# Altium PCB PCB2.PcbDoc
Units mil, origin at the board's own origin, x right, y up, seen from the top; angles counter-clockwise.
Board outline 6000 x 4000 mil, 2 copper layers (Top Layer, Bottom Layer); 91 components, 50 nets, 356 pads, 23 vias.
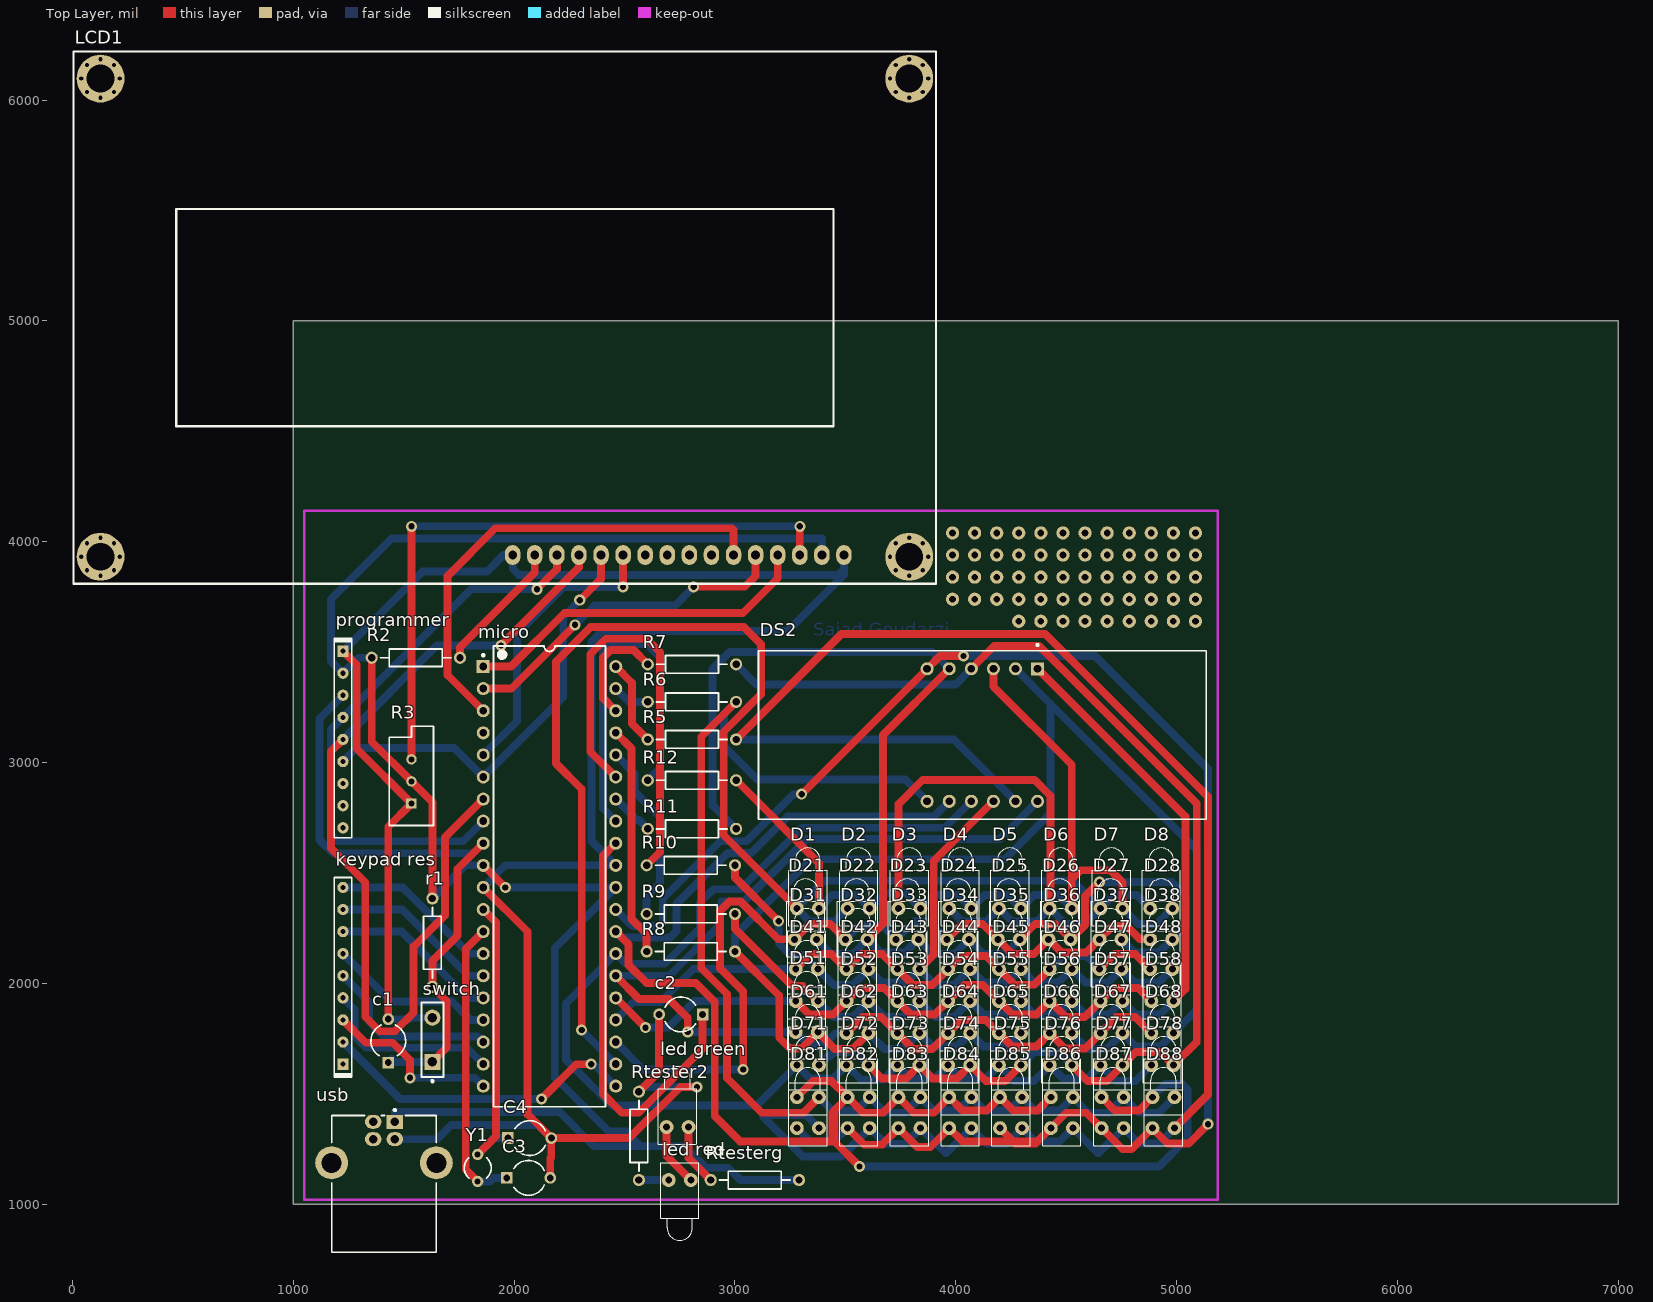
[diagram p0: Top Layer view]
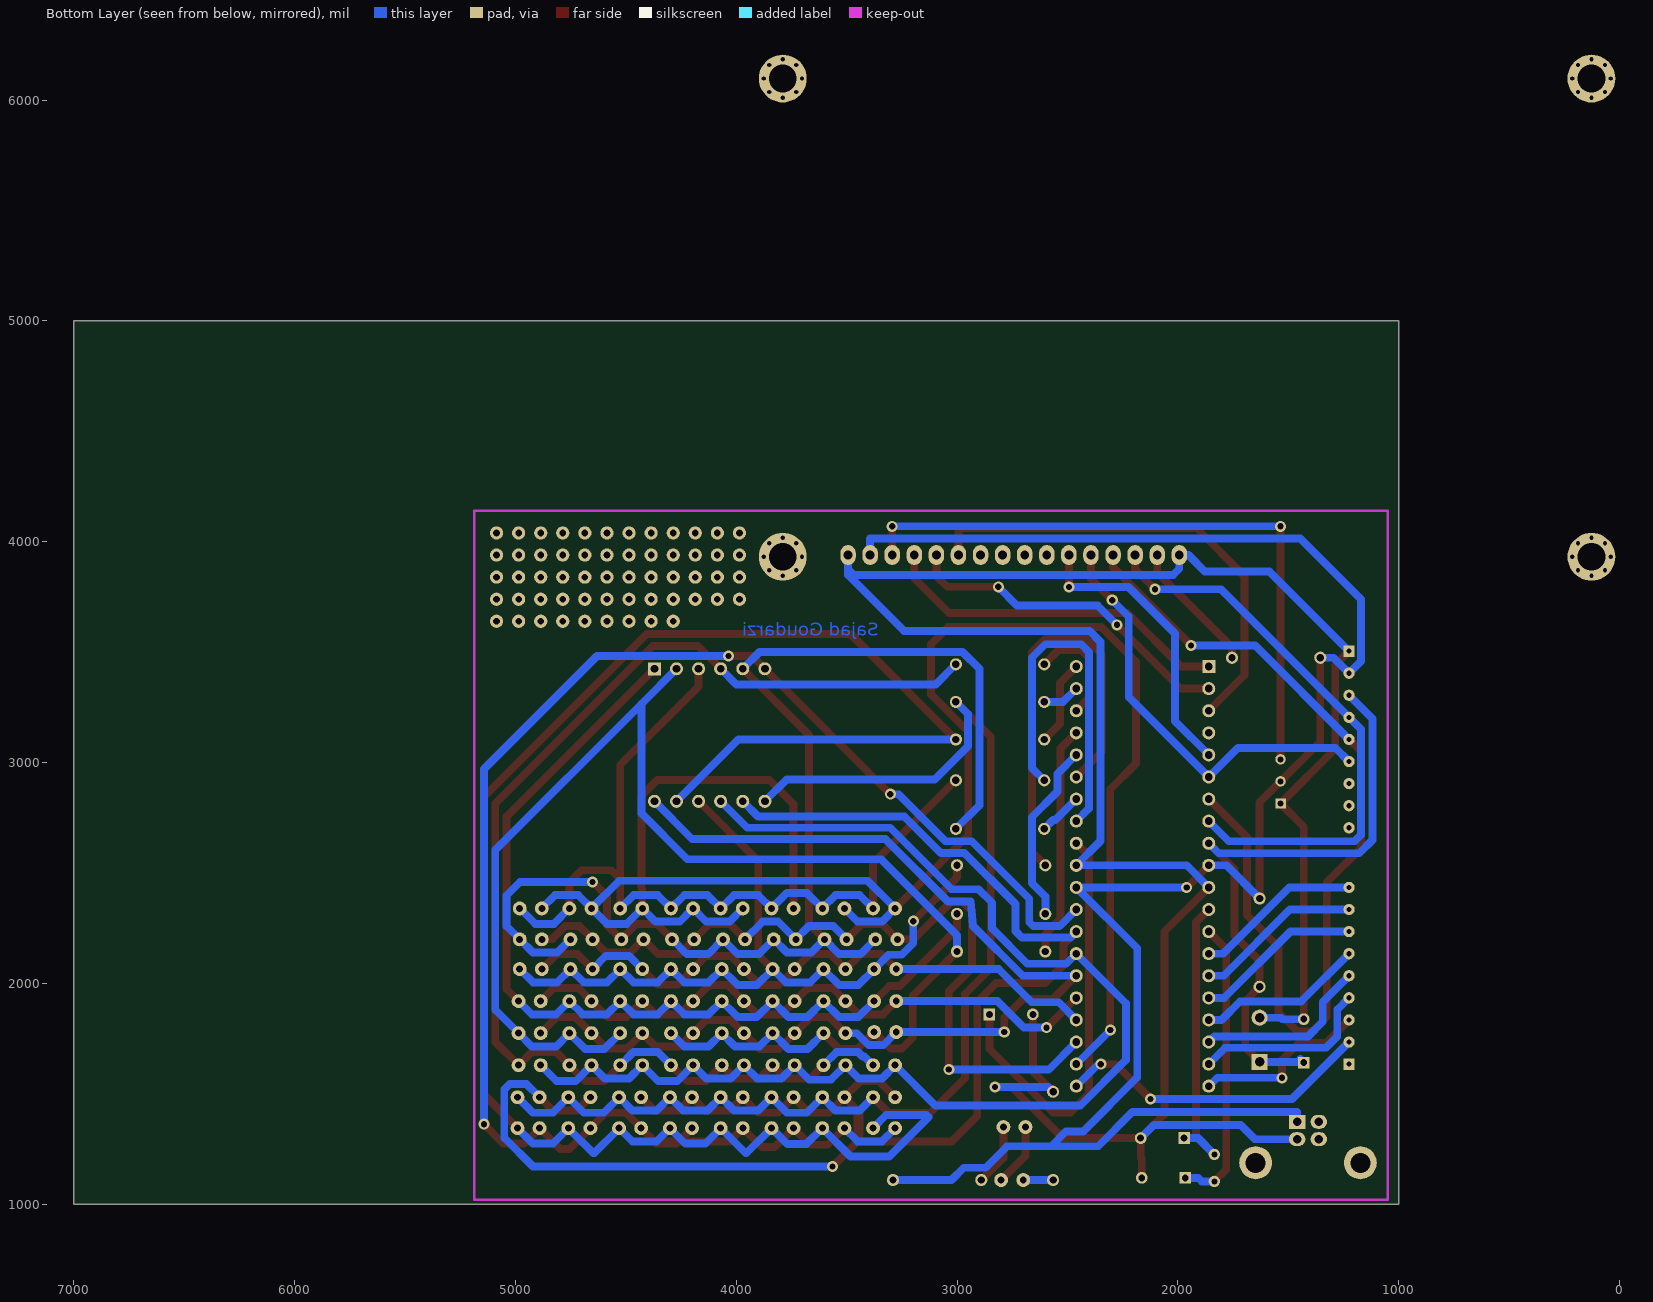
[diagram p1: Bottom Layer view, seen from below]

## Layer stack, top to bottom
Top Solder: solder mask 0.4, Solder Resist, Dk 3.5
Top Layer: signal copper 1.4
Dielectric 1: dielectric 12.6, FR-4, Dk 4.8
Bottom Layer: signal copper 1.4
Bottom Solder: solder mask 0.4, Solder Resist, Dk 3.5

## Board outline
1000,1000 7000,1000 7000,5000 1000,5000

## Design rules (kind name [scope] priority, off if disabled: settings)
Clearance [All] p1: gap=10 except(15.75: Track-Track)
PolygonConnect [All] p1: connectstyle=Relief reliefconductorwidth=10 reliefentries=4 polygonreliefangle="90 Angle" airgapwidth=10
RoutingVias [All] p1: holewidth=28 width=50 viastyle="Through Hole" minholewidth=28 minwidth=50 maxholewidth=28 maxwidth=50
SolderMaskExpansion [All] p1: expansion=4
Width [All] p1: maxlimit=39.37 minlimit=27.56 preferedwidth=35.43
30 further rules are at their usual default settings.

## Components (designator, comment, footprint, x,y, rotation, side; value= is the part's Value field where it differs from the comment)
c1 "Cap2" CAPR5-4X5 1430,1740 r90 top
c2 "Cap2" CAPR5-4X5 2755,1860 r180 top
C3 "Cap2" CAPR5-4X5 2065,1120 r0 top
C4 "Cap2" CAPR5-4X5 2070,1300 r0 top
D1 "LED1" LED-1 3330,2340 r90 top
D2 "LED1" LED-1 3560,2340 r90 top
D3 "LED1" LED-1 3790,2340 r90 top
D4 "LED1" LED-1 4020,2340 r90 top
D5 "LED1" LED-1 4245,2340 r90 top
D6 "LED1" LED-1 4475,2340 r90 top
D7 "LED1" LED-1 4705,2340 r90 top
D8 "LED1" LED-1 4930,2340 r90 top
D21 "LED1" LED-1 3320,2200 r90 top
D22 "LED1" LED-1 3550,2200 r90 top
D23 "LED1" LED-1 3780,2200 r90 top
D24 "LED1" LED-1 4010,2200 r90 top
D25 "LED1" LED-1 4240,2200 r90 top
D26 "LED1" LED-1 4470,2200 r90 top
D27 "LED1" LED-1 4700,2200 r90 top
D28 "LED1" LED-1 4930,2200 r90 top
D31 "LED1" LED-1 3325,2065 r90 top
D32 "LED1" LED-1 3555,2065 r90 top
D33 "LED1" LED-1 3785,2065 r90 top
D34 "LED1" LED-1 4015,2065 r90 top
D35 "LED1" LED-1 4245,2065 r90 top
D36 "LED1" LED-1 4475,2065 r90 top
D37 "LED1" LED-1 4700,2065 r90 top
D38 "LED1" LED-1 4930,2065 r90 top
D41 "LED1" LED-1 3325,1920 r90 top
D42 "LED1" LED-1 3555,1920 r90 top
D43 "LED1" LED-1 3785,1920 r90 top
D44 "LED1" LED-1 4015,1920 r90 top
D45 "LED1" LED-1 4245,1920 r90 top
D46 "LED1" LED-1 4475,1920 r90 top
D47 "LED1" LED-1 4705,1920 r90 top
D48 "LED1" LED-1 4935,1920 r90 top
D51 "LED1" LED-1 3325,1780 r90 top
D52 "LED1" LED-1 3555,1775 r90 top
D53 "LED1" LED-1 3785,1775 r90 top
D54 "LED1" LED-1 4015,1775 r90 top
D55 "LED1" LED-1 4245,1775 r90 top
D56 "LED1" LED-1 4475,1775 r90 top
D57 "LED1" LED-1 4705,1775 r90 top
D58 "LED1" LED-1 4935,1775 r90 top
D61 "LED1" LED-1 3330,1630 r90 top
D62 "LED1" LED-1 3555,1630 r90 top
D63 "LED1" LED-1 3785,1630 r90 top
D64 "LED1" LED-1 4015,1630 r90 top
D65 "LED1" LED-1 4245,1630 r90 top
D66 "LED1" LED-1 4475,1630 r90 top
D67 "LED1" LED-1 4705,1630 r90 top
D68 "LED1" LED-1 4935,1630 r90 top
D71 "LED1" LED-1 3330,1485 r90 top
D72 "LED1" LED-1 3560,1485 r90 top
D73 "LED1" LED-1 3790,1485 r90 top
D74 "LED1" LED-1 4020,1485 r90 top
D75 "LED1" LED-1 4250,1485 r90 top
D76 "LED1" LED-1 4480,1485 r90 top
D77 "LED1" LED-1 4710,1485 r90 top
D78 "LED1" LED-1 4940,1485 r90 top
D81 "LED1" LED-1 3330,1345 r90 top
D82 "LED1" LED-1 3560,1345 r90 top
D83 "LED1" LED-1 3790,1345 r90 top
D84 "LED1" LED-1 4020,1345 r90 top
D85 "LED1" LED-1 4250,1345 r90 top
D86 "LED1" LED-1 4480,1345 r90 top
D87 "LED1" LED-1 4710,1345 r90 top
D88 "LED1" LED-1 4940,1345 r90 top
DS2 "HDSP-B10G" B-88 4120,3125 r180 top
"keypad res" "Array Resistor" "Res Array" 1225,1635 r180 top
LCD1 "20x4" "LCD 20x4" 1958,5014.8 r180 top
"led green" "LED1" LED-1 2740,1350 r90 top
"led red" "LED1" LED-1 2750,1110 r270 top
micro "ATmega16L-8PU" 40P6 2160,2485 r0 top
programmer "Array Resistor" "Res Array" 1225,3505 r0 top
r1 "Res2" AXIAL-0.4 1630,2185 r90 top
R2 "Res2" AXIAL-0.4 1555,3475 r0 top
R3 "RPot" VR5 1535,2915 r90 top
R5 "Res2" AXIAL-0.4 2805,3105 r0 top
R6 "Res2" AXIAL-0.4 2805,3275 r0 top
R7 "Res2" AXIAL-0.4 2805,3445 r0 top
R8 "Res2" AXIAL-0.4 2800,2145 r0 top
R9 "Res2" AXIAL-0.4 2800,2315 r0 top
R10 "Res2" AXIAL-0.4 2800,2535 r0 top
R11 "Res2" AXIAL-0.4 2805,2700 r0 top
R12 "Res2" AXIAL-0.4 2805,2920 r0 top
Rtester2 "Res2" AXIAL-0.4 2565,1310 r270 top
Rtesterg "Res2" AXIAL-0.4 3090,1110 r180 top
switch "SW-PB" SPST-2 1630,1745 r90 top
usb "USB Connector" USB2.5-2H4E 1410.79,1334.37 r270 top (schematic designator p?)
Y1 "XTAL" R38 1835,1165 r0 top

## Footprints (in the part's own frame and the unit in brackets; to place one, negate y for a bottom-side part, rotate by r counter-clockwise, add the part's x,y. Pads: shape width x height; smd on the part's side, far side on the other; paste and mask are expansions set on the pad)
40P6 [mm] "40-Pin Ceramic Dual In-Line Package (CerDIP)"
  rect 1.5x1.5 hole 0.9: 1(-7.62,24.13)
  round 1.5 hole 0.9: 2(-7.62,21.59) 3(-7.62,19.05) 4(-7.62,16.51) 5(-7.62,13.97) 6(-7.62,11.43) 7(-7.62,8.89) 8(-7.62,6.35) 9(-7.62,3.81) 10(-7.62,1.27) 11(-7.62,-1.27) 12(-7.62,-3.81) 13(-7.62,-6.35) 14(-7.62,-8.89) 15(-7.62,-11.43) 16(-7.62,-13.97) 17(-7.62,-16.51) 18(-7.62,-19.05) 19(-7.62,-21.59) 20(-7.62,-24.13) 21(7.62,-24.13) 22(7.62,-21.59) 23(7.62,-19.05) 24(7.62,-16.51) 25(7.62,-13.97) 26(7.62,-11.43) 27(7.62,-8.89) 28(7.62,-6.35) 29(7.62,-3.81) 30(7.62,-1.27) 31(7.62,1.27) 32(7.62,3.81) 33(7.62,6.35) 34(7.62,8.89) 35(7.62,11.43) 36(7.62,13.97) 37(7.62,16.51) 38(7.62,19.05) 39(7.62,21.59) 40(7.62,24.13)
  silkscreen extent -7.74,-26.5 6.45,26.5, body extent -7.05,-26.47 7.05,26.47, height 4.83
AXIAL-0.4 [mm] "Axial Device, Thru-Hole; 2 Leads; 0.4 in Pin Spacing"
  round 1.4 hole 0.85: 1(-5.08,0) 2(5.08,0)
  silkscreen extent -4.06,-1.02 4.06,1.02
B-88 [mm] "LED, 7-Segment Display, 14.22 mm, Four Digit, 88:88; 12 Leads; Row Space 15.24 mm; Pitch 2.54 mm"
  rect 1.5x1.5 hole 0.9: 1(-6.35,-7.62)
  round 1.5 hole 0.9: 2(-3.81,-7.62) 3(-1.27,-7.62) 4(1.27,-7.62) 5(3.81,-7.62) 6(6.35,-7.62) 7(6.35,7.62) 8(3.81,7.62) 9(1.27,7.62) 10(-1.27,7.62) 11(-3.81,7.62) 12(-6.35,7.62)
  silkscreen extent -25.75,-10.47 25.75,9.7
CAPR5-4X5 [mm] "Capacitor; 2 Leads"
  rect 1.35x1.35 hole 0.8: 1(-2.5,0)
  round 1.35 hole 0.8: 2(2.5,0)
  silkscreen extent -1.69,-2 1.82,2
"LCD 20x4" [mm]
  oval 1.778x2.286 hole 1.016: 1(-39,27.3) 2(-36.46,27.3) 3(-33.92,27.3) 4(-31.38,27.3) 5(-28.84,27.3) 6(-26.3,27.3) 7(-23.76,27.3) 8(-21.22,27.3) 9(-18.68,27.3) 10(-16.14,27.3) 11(-13.6,27.3) 12(-11.06,27.3) 13(-8.52,27.3) 14(-5.98,27.3) 15(-3.44,27.3) 16(-0.9,27.3)
  round 1 hole 0.5: MH(-48.7,27.5) MH(-48.7,-27.5) MH(-48.056,25.944) MH(-48.056,29.056) MH(-48.056,-29.056) MH(-48.056,-25.944) MH(-46.5,25.3) MH(-46.5,29.7) MH(-46.5,-29.7) MH(-46.5,-25.3) MH(-44.944,25.944) MH(-44.944,29.056) MH(-44.944,-29.056) MH(-44.944,-25.944) MH(-44.3,27.5) MH(-44.3,-27.5) MH(44.3,27.5) MH(44.3,-27.5) MH(44.944,25.944) MH(44.944,29.056) MH(44.944,-29.056) MH(44.944,-25.944) MH(46.5,25.3) MH(46.5,29.7) MH(46.5,-29.7) MH(46.5,-25.3) MH(48.056,25.944) MH(48.056,29.056) MH(48.056,-29.056) MH(48.056,-25.944) MH(48.7,27.5) MH(48.7,-27.5)
  round 5.5 hole 3.2: MH(-46.5,27.5) MH(-46.5,-27.5) MH(46.5,27.5) MH(46.5,-27.5)
  silkscreen extent -49.6,-30.6 49.6,30.6, body extent -49,-30 49,30, height 26.17
LED-1 [mm] "LED; 2 Leads"
  round 1.6 hole 0.8: 1(0,1.27) 2(0,-1.27)
  silkscreen extent -2,-2.2 6.95,2.2
R38 [mm] "Crystal, Thru-Hole; 2 Leads; Body 3.1 x 8.2 mm (Dia.xH)"
  round 1.3 hole 0.7: 1(0,1.55) 2(0,-1.55)
  silkscreen extent -1.55,-1.19 1.55,1.17
"Res Array" [mm]
  rect 1.3x1.3 hole 0.6: 1(0,0)
  round 1.3 hole 0.6: 2(0,-2.54) 3(0,-5.08) 4(0,-7.62) 5(0,-10.16) 6(0,-12.7) 7(0,-15.24) 8(0,-17.78) 9(0,-20.32)
  silkscreen extent -1,-21.46 1,1.5, body extent -0.62,-21.38 0.63,1.12, height 5.4
SPST-2 [mm] "Switch; 2 Leads"
  rect 1.85x1.85 hole 1.1: 1(-2.54,0)
  round 1.85 hole 1.1: 2(2.54,0)
  silkscreen extent -4.89,-1.27 4.28,1.27
USB2.5-2H4E [mm] "Connector; USB1.1, Type B, Thru-Hole; 4 Position; Right Angle"
  rect 1.6x1.9 hole 1: 1(-1,1.25)
  oval 1.6x1.9 hole 1: 2(-1,-1.25) 3(1,-1.25) 4(1,1.25)
  round 3.8 hole 2.3: 5(3.71,6.02) 6(3.71,-6.02)
  silkscreen extent -2.47,-6.02 13.99,6.02, body extent -2.5,-7.45 14,7.45, height 10.95
VR5 [mm] "Thru-Hole; 3 Leads"
  rect 1.2x1.2 hole 0.7: 1(-2.54,0)
  round 1.2 hole 0.7: 2(0,0) 3(2.54,0)
  silkscreen extent -5.08,-2.54 6.35,2.54

## Part data
c1 c2 C3 C4: "Capacitor"
D1 D2 D3 D4 D5 D6 D7 D8 D21 D22 D23 D24 D25 D26 D27 D28 D31 D32 D33 D34 D35 D36 D37 D38 D41 D42 D43 D44 D45 D46 D47 D48 D51 D52 D53 D54 D55 D56 D57 D58 D61 D62 D63 D64 D65 D66 D67 D68 D71 D72 D73 D74 D75 D76 D77 D78 D81 D82 D83 D84 D85 D86 D87 D88 "led green" "led red": "Typical RED GaAs LED"
DS2: "14.22 mm Untinted, 88:88 4-Digit 7-Segment Display: CA, Black Surface"
"keypad res" programmer: library part "Res Array", "Resistor Pack"
LCD1: library part LCD
micro: "8-bit AVR Microcontroller, 2.7-5.5V, 16KB Flash, 512 Bytes EEPROM, 1KB SRAM, 40-pin PDIP, Industrial Grade (-40°C to 85°C), Pb-Free"
r1 R2 R5 R6 R7 R8 R9 R10 R11 R12 Rtester2 Rtesterg: "Resistor"
R3: "Potentiometer"
switch: "Switch"
usb: library part USB, "USB Connector-B Type"
Y1: "Crystal Oscillator"

## Free pads (board coordinates)
  round 60 hole 30: 0(3985,3740) 0(3985,3840) 0(3985,3940) 0(3985,4040) 1(4085,3740) 1(4085,3840) 1(4085,3940) 1(4085,4040) 2(4185,3740) 2(4185,3840) 2(4185,3940) 2(4185,4040) 3(4285,3640) 3(4285,3740) 3(4285,3840) 3(4285,3940) 3(4285,4040) 4(4385,3640) 4(4385,3740) 4(4385,3840) 4(4385,3940) 4(4385,4040) 5(4485,3640) 5(4485,3740) 5(4485,3840) 5(4485,3940) 5(4485,4040) 6(4585,3640) 6(4585,3740) 6(4585,3840) 6(4585,3940) 6(4585,4040) 7(4685,3640) 7(4685,3740) 7(4685,3840) 7(4685,3940) 7(4685,4040) 8(4785,3640) 8(4785,3740) 8(4785,3840) 8(4785,3940) 8(4785,4040) 8(5085,3640) 8(5085,3740) 8(5085,3840) 8(5085,3940) 8(5085,4040) 9(4885,3640) 9(4885,3740) 9(4885,3840) 9(4885,3940) 9(4885,4040) 10(4985,3640) 10(4985,3740) 10(4985,3840) 10(4985,3940) 10(4985,4040)

## Via types
v1: diameter 50, hole 28, Top Layer to Bottom Layer, 23 vias

## Nets (pads, with @x,y where several pads share a name; then routed paths per layer and width w, separated by ;. In a path a pad name is that pad's centre, name@x,y a point inside that pad or via, vN(x,y) a via of type N, cw(c..) or ccw(c..) an arc to the next point about the centre after c; other vN are vias at no path point)
Netc1_1: c1.1 micro.9 programmer.3 r1.1 switch.1 | length 2834.3
  Top Layer w35.43: switch.1 1695,1710 1695,1920 r1.1 1630,2103 1744,2217 1744,2519 micro.9
  Bottom Layer w35.43: programmer.3 1119,3199 1119,2650 1179,2590 1815,2590 micro.9 ; c1.1 1445.99,1657.56 1458.55,1645 switch.1
Netc1_2: c1.2 c2.2 C3.2 C4.2 LCD1.1 LCD1.16 micro.11 micro.31 programmer.1 R3.1 Rtester2.1 switch.2 usb.4 | length 11251.6
  Top Layer w35.43: programmer.1 1287,3443 1287,3063 R3.1 1430,2710 c1.2 ; micro.11 2061.1,2233.9 2061.1,1407.33 C4.2 ; C3.2 2163.43,1207 2168.43,1212 C4.2 ; Rtester2.1 2656.57,1601.57 c2.2 ; v1(2828,1532) 2753.79,1532 2521.79,1300 C4.2
  Bottom Layer w35.43: programmer.1 1585,3865 1877,3865 1952,3940 LCD1.16 1993.43,3877.57 2021,3850 3468.43,3850 3493.43,3875 ; c1.2 1526,1838.43 1532.57,1845 switch.2 ; usb.4 1651,1295 1715,1359 2109.43,1359 C4.2 ; micro.11 1960,2535 micro.31 2350,2645 2350,3546.51 2400,3596.51 3239.94,3596.51 3493.43,3850 3493.43,3875 ; Rtester2.1 2587,1532 v1(2828,1532) ; LCD1.1 3493.43,3875
Netc2_1: c2.1 micro.32 | length 1921.1
  Top Layer w35.43: micro.32 2402,2577 2402,1500 2487,1415 2564,1415 2853.43,1704.43 c2.1
NetC3_1: C3.1 micro.13 Y1.2 | length 1324.3
  Top Layer w35.43: Y1.2 1781,1157.98 1781,2156 micro.13
  Bottom Layer w35.43: Y1.2 1892,1103.98 1908.02,1120 C3.1
NetC4_1: C4.1 micro.12 Y1.1 | length 1334.6
  Top Layer w35.43: Y1.1 1918,1309.02 1918,2277 micro.12
  Bottom Layer w35.43: Y1.1 1908.98,1300 C4.1
NetD1_1: D1.1 D2.1 D3.1 D4.1 D5.1 D6.1 D7.1 D8.1 micro.22 | length 8984.7
  Top Layer w35.43: v1(2306,1789) 2306,2880 2189.65,2996.35 2189.65,3457.42 2345.82,3613.59 3040.41,3613.59 3118,3536 3118,3309 2949,3140 2949,2671 D1.1 ; D3.1 3740,2812 3850,2922 4356,2922 4428,2850 4428,2430 4425,2427 D6.1
  Bottom Layer w35.43: v1(2306,1789) micro.22 ; D2.1 3450,2280 3340,2280 D1.1 3405,2465 4530,2465 D7.1 ; D4.1 4030,2280 4135,2280 D5.1 4255,2280 4365,2280 D6.1 4495,2270 4585,2270 D7.1 ; D8.1 4820,2400 4715,2400 D7.1
NetD1_2: D1.2 D2.2 D3.2 D4.2 D5.2 D6.2 D7.2 D8.2 DS2.3 R12.2 | length 4039.8
  Top Layer w35.43: R12.2 3380,2545 D1.2 ; DS2.3 4170,3345 4525,2990 4525,2472 ; D6.2 4525,2472 ; D7.2 4755,2458 4700,2513 4566,2513 4525,2472
  Bottom Layer w35.43: D1.2 3440,2400 3550,2400 D2.2 3679.82,2409.82 3770.18,2409.82 D3.2 3900,2400 4010,2400 D4.2 4130,2400 4235,2400 D5.2 4355,2400 4465,2400 D6.2 ; D7.2 4825,2270 4910,2270 D8.2
NetD21_1: D21.1 D22.1 D23.1 D24.1 D25.1 D26.1 D27.1 D28.1 micro.23 | length 3814
  Top Layer w35.43: v1(3037.18,1610) 3037.18,1963.93 2932.11,2069 2932.11,2328.11 2975,2371 3025,2371 3196,2200 D21.1 3340,2270 3430,2270 D22.1 ; D24.1 4030,2270 4120,2270 D25.1 4257,2133 4353,2133 D26.1 4480,2140 4590,2140 D27.1 4710,2260 4773.74,2260 4833.74,2200 D28.1
  Bottom Layer w35.43: micro.23 2585,1610 v1(3037.18,1610) ; D22.1 3560,2260 3670,2260 D23.1 3810,2280 3880,2280 D24.1
NetD21_2: D21.2 D22.2 D23.2 D24.2 D25.2 D26.2 D27.2 D28.2 DS2.5 R11.2 | length 5937.3
  Top Layer w35.43: D22.2 3670,2270 3670,3125 DS2.5 ; D25.2 4360,2270 4450,2270 D26.2 4585,2265 4585,2395 v1(4650,2460)
  Bottom Layer w35.43: R11.2 2898.54,2806.46 2898.54,3424.54 2975,3501 3894,3501 DS2.5 ; D21.2 3437,2133 3533,2133 D22.2 3660,2140 3770,2140 D23.2 3897,2133 3993,2133 D24.2 4127,2133 4223,2133 D25.2 ; v1(4650,2460) 4978.21,2460 5039.21,2399 5039.21,2259.21 D28.2 4920,2140 4810,2140 D27.2
NetD31_1: D31.1 D32.1 D33.1 D34.1 D35.1 D36.1 D37.1 D38.1 micro.24 | length 2902.1
  Top Layer w35.43: D31.1 3343,2133 3437,2133 D32.1 3573,2133 3667,2133 D33.1 3807,1993 3893,1993 D34.1 4025,2125 4135,2125 D35.1 4266,1994 4354,1994 D36.1 ; D37.1 4718,2133 4812,2133 D38.1
  Bottom Layer w35.43: micro.24 2540,1915 2661,1915 2811,2065 D31.1 ; D36.1 4485,2125 4590,2125 D37.1
NetD31_2: D31.2 D32.2 D33.2 D34.2 D35.2 D36.2 D37.2 D38.2 DS2.10 R10.2 | length 3532.1
  Top Layer w35.43: R10.2 3000,2480 v1(3198,2282) ; D33.2 3900,2130 3900,2555 DS2.10
  Bottom Layer w35.43: v1(3198,2282) 3198,2182 3250,2130 3310,2130 D31.2 3447,1993 3533,1993 D32.2 3665,2005 3775,2005 D33.2 3907,1993 3993,1993 D34.2 4125,2005 4235,2005 D35.2 4355,2005 4465,2005 D36.2 4585,2005 4690,2005 D37.2 4810,2005 4920,2005 D38.2
NetD41_1: D41.1 D42.1 D43.1 D44.1 D45.1 D46.1 D47.1 D48.1 micro.25 | length 2899.3
  Top Layer w35.43: micro.25 v1(2595,1800) ; D41.1 3335,1860 3445,1860 D42.1 3565,1980 3675,1980 D43.1 3795,1860 3905,1860 D44.1 4038,1993 4122,1993 D45.1 4255,1860 4365,1860 D46.1 4497,1848 4583,1848 D47.1 4715,1980 4825,1980 D48.1
  Bottom Layer w35.43: v1(2595,1800) 2697,1800 2817,1920 D41.1
NetD41_2: D41.2 D42.2 D43.2 D44.2 D45.2 D46.2 D47.2 D48.2 DS2.1 R9.2 | length 4370.3
  Top Layer w35.43: R9.2 3000,2248 3260,1988 3307,1988 D41.2 ; DS2.1 5039.21,2755.79 5039.21,1974.21 D48.2
  Bottom Layer w35.43: D41.2 3447,1848 3533,1848 D42.2 3677,1848 3763,1848 D43.2 3907,1848 3993,1848 D44.2 4125,1860 4235,1860 D45.2 4355,1860 4465,1860 D46.2 4585,1860 4695,1860 D47.2 4815,1860 4925,1860 D48.2
NetD51_1: D51.1 D52.1 D53.1 D54.1 D55.1 D56.1 D57.1 D58.1 DS2.12 micro.26 | length 5245.1
  Top Layer w35.43: micro.26 2565,1930 2700,1930 2786,1844 v1(2786,1780) ; D52.1 3578,1848 3662,1848 D53.1 3807,1703 3893,1703 D54.1 4025,1835 4135,1835 D55.1 4255,1715 4365,1715 D56.1 4495,1705 4585,1705 D57.1 4728,1848 4812,1848 D58.1
  Bottom Layer w35.43: micro.26 2702,2035 2927.68,2260.68 2938,2371 3040.95,2371 3323.59,2653.64 4198.64,2653.64 DS2.12 ; v1(2786,1780) D51.1 3334.21,1720.79 3399.53,1720.79 3453.74,1775 D52.1
NetD51_2: D51.2 D52.2 D53.2 D54.2 D55.2 D56.2 D57.2 D58.2 DS2.2 R8.2 | length 6670.2
  Top Layer w35.43: R8.2 3200,1945 3200,1755 3250,1705 3300,1705 D51.2 3452,1703 3533,1703 D52.2
  Bottom Layer w35.43: R8.2 3000,2218.23 3344.13,2562.36 4220.75,2562.36 4428,2769.61 4428,3267 ; D52.2 3677,1703 3763,1703 D53.2 3895,1715 4005,1715 D54.2 4125,1715 4235,1715 D55.2 ; DS2.2 4428,3267 ; D56.2 4597,1703 4683,1703 D57.2 4815,1715 4925,1715 D58.2 5090.4,1880.4 5090.4,2604.6 4428,3267
NetD61_1: D61.1 D62.1 D63.1 D64.1 D65.1 D66.1 D67.1 D68.1 DS2.9 micro.27 | length 5759.4
  Bottom Layer w35.43: DS2.9 3949.82,2704.82 3302.39,2704.82 3024.29,2426.72 2902.72,2426.72 2841,2365 2841,2249 2681.72,2089.72 2505.28,2089.72 micro.27 2235.28,1910.28 2235.28,1653.95 2442.23,1447 3097,1447 D61.1 3340,1570 3445,1570 D62.1 3571,1564 3669,1564 D63.1 3795,1570 3905,1570 D64.1 4025,1570 4135,1570 D65.1 4267,1558 4353,1558 D66.1 4485,1570 4595,1570 D67.1 4727,1558 4813,1558 D68.1
NetD61_2: D61.2 D62.2 D63.2 D64.2 D65.2 D66.2 D67.2 D68.2 DS2.4 R7.2 | length 5692.3
  Top Layer w35.43: D62.2 3665,1570 3775,1570 D63.2 3895,1570 4005,1570 D64.2 4137,1558 4223,1558 D65.2 ; DS2.4 4173.71,3528.71 4376.29,3528.71 5090.4,2814.6 5090.4,1735.4 D68.2 4925,1690 4815,1690 D67.2 4683,1558 4597,1558 D66.2
  Bottom Layer w35.43: R7.2 3096,3354 3999,3354 DS2.4 ; D61.2 3419.61,1669.61 3428.23,1669.61 3448.63,1690 3545,1690 D62.2 ; D65.2 4355,1690 4465,1690 D66.2
NetD71_1: D71.1 D72.1 D73.1 D74.1 D75.1 D76.1 D77.1 D78.1 DS2.8 micro.28 | length 7768
  Top Layer w35.43: micro.28 2518,2177 2518,2084 2600,2002 2822.19,2002 2908,1916.19 2908,1400 3023,1285 3440,1285 3440,1415 3450,1425 ; D71.1 3353,1558 3437,1558 D72.1 ; v1(3564,1171) 3450,1285 3450,1425 ; D76.1 4370,1425 4260,1425 D75.1 4140,1425 4030,1425 D74.1 3900,1415 3810,1415 D73.1 3670,1415 3580,1415 D72.1 ; D77.1 4720,1425 4830,1425 D78.1 ; 3450,1425 D72.1
  Bottom Layer w35.43: micro.28 2486.46,2208.54 2706.45,2208.54 2735.54,2237.63 2735.54,2359.73 2966.81,2591 3073.15,2591 3238.15,2756 3901,2756 DS2.8 ; v1(3564,1171) 4920,1171 5050,1301 5050,1520 5025,1545 4950,1545 D78.1
NetD71_2: D71.2 D72.2 D73.2 D74.2 D75.2 D76.2 D77.2 D78.2 DS2.7 R6.2 | length 5556.2
  Top Layer w35.43: R6.2 2847.36,3117.36 2847.36,2069.15 2963.37,1953.14 2963.37,1572.63 3121,1415 3310,1415 D71.2
  Bottom Layer w35.43: R6.2 2949.72,3219.72 2949.72,3075 3100.72,2924 3771,2924 DS2.7 ; D71.2 3440,1425 3550,1425 D72.2 3680,1415 3770,1415 D73.2 3900,1425 4010,1425 D74.2 4130,1425 4240,1425 D75.2 4360,1425 4470,1425 D76.2 4600,1415 4690,1415 D77.2 4830,1415 4920,1415 D78.2
NetD81_1: D81.1 D82.1 D83.1 D84.1 D85.1 D86.1 D87.1 D88.1 DS2.6 micro.29 | length 7602
  Top Layer w35.43: v1(3302,2857) DS2.6 3928,3483 v1(4035,3483) ; D82.1 3585,1270 3665,1270 D83.1 3826,1259 3884,1259 D84.1 4030,1285 4260,1285 ; D85.1 4260,1285 ; v1(5142,1363) 5054,1275 4960,1275 D88.1 4795,1250 4755,1250 D87.1 4590,1415 4500,1415 D86.1 4370,1285 ; 4260,1285 4270,1275 4360,1275 4370,1285 ; 4260,1285 4370,1285
  Bottom Layer w35.43: micro.29 2535.28,2259.72 2655,2259.72 2672.9,2277.62 2672.9,2383.45 2933.44,2644 3052,2644 3265,2857 v1(3302,2857) ; D81.1 3340,1285 3450,1285 D82.1 ; v1(4035,3483) 4630,3483 5142,2971 v1(5142,1363)
NetD81_2: D81.2 D82.2 D83.2 D84.2 D85.2 D86.2 D87.2 D88.2 DS2.11 R5.2 | length 8266
  Top Layer w35.43: R5.2 3482.28,3582.28 4404.72,3582.28 5142,2845 5142,1497 D88.2
  Bottom Layer w35.43: R5.2 3990,3105 DS2.11 ; D81.2 3320,1405 3139,1405 3129,1395 3307,1217 3482,1217 D82.2 3682,1273 3768,1273 D83.2 3954,1231 3956,1231 D84.2 4140,1275 4230,1275 D85.2 4360,1285 4470,1285 D86.2 4644,1231 4646,1231 D87.2 4830,1275 4920,1275 D88.2
"Netkeypad res_2": "keypad res.2" micro.21 | length 1448.3
  Top Layer w35.43: v1(2124,1477) 2281.44,1634.44 v1(2349,1634.44)
  Bottom Layer w35.43: 1225,1735 1483,1477 v1(2124,1477) ; v1(2349,1634.44) 2360.56,1634.44 micro.21
"Netkeypad res_3": "keypad res.3" micro.20 | length 806.1
  Top Layer w35.43: 1225,1835 1328,1732 1450,1732 1529,1653 v1(1529,1573)
  Bottom Layer w35.43: v1(1529,1573) 1822,1573 micro.20
"Netkeypad res_4": "keypad res.4" micro.19 | length 830.4
  Bottom Layer w35.43: 1225,1935 1278.31,1881.69 1278.31,1760.32 1329.49,1709.13 1785.87,1709.13 micro.19
"Netkeypad res_5": "keypad res.5" micro.18 | length 811.2
  Bottom Layer w35.43: 1225,2035 1344.07,1915.93 1344.07,1827.27 1411.03,1760.32 1834.68,1760.32 micro.18
"Netkeypad res_6": "keypad res.6" micro.17 | length 759.3
  Bottom Layer w35.43: 1225,2135 1441,1919 1718,1919 1802,1835 micro.17
"Netkeypad res_7": "keypad res.7" micro.16 | length 759.3
  Bottom Layer w35.43: 1225,2235 1490.28,2235 1790.28,1935 micro.16
"Netkeypad res_8": "keypad res.8" micro.15 | length 759.3
  Bottom Layer w35.43: 1225,2335 1492.92,2335 1792.92,2035 micro.15
"Netkeypad res_9": "keypad res.9" micro.14 | length 759.3
  Bottom Layer w35.43: 1225,2435 1495.28,2435 1795.28,2135 micro.14
NetLCD1_2: LCD1.2 micro.10 micro.30 programmer.2 r1.2 R2.1 R3.2 Rtesterg.1 usb.1 | length 8560.7
  Top Layer w35.43: R2.1 1355,3095 R3.2 1630,2820 r1.2 ; micro.10 v1(1960,2435)
  Bottom Layer w35.43: R2.1 1295,3475 programmer.2 1171,3459 1171,3740 1446,4015 3393.43,4015 LCD1.2 ; usb.1 1460,1418 2206,1418 2361,1263 2574,1263 ; r1.2 1780,2535 micro.10 ; v1(1960,2435) micro.30 2184,2159 2184,1574.78 2428.78,1330 2507,1330 2574,1263 ; Rtesterg.1 3025,1110 2969,1166 2870,1166 2773,1263 2574,1263
NetLCD1_3: LCD1.3 R3.3 | length 2943.4
  Top Layer w35.43: R3.3 v1(1535,4070) ; LCD1.3 v1(3293.43,4070)
  Bottom Layer w35.43: v1(1535,4070) v1(3293.43,4070)
NetLCD1_4: LCD1.4 micro.1 | length 1603.9
  Top Layer w35.43: micro.1 1985.46,3435 2227.46,3677 3035,3677 3193.43,3835.43 LCD1.4
NetLCD1_5: LCD1.5 micro.2 | length 1539.7
  Top Layer w35.43: micro.2 1987,3335 v1(2276,3624) ; v1(2813,3796) 3044.43,3796 3093.43,3845 LCD1.5
  Bottom Layer w35.43: v1(2276,3624) 2363,3711 2728,3711 v1(2813,3796)
NetLCD1_6: LCD1.6 micro.3 | length 2176.9
  Top Layer w35.43: micro.3 1699,3396 1699,3845 1915,4061 2985.43,4061 2993.43,4053 LCD1.6
NetLCD1_11: LCD1.11 micro.5 | length 1325.5
  Top Layer w35.43: v1(2493.43,3795) LCD1.11
  Bottom Layer w35.43: micro.5 2013,3188 2013,3584.48 2223.52,3795 v1(2493.43,3795)
NetLCD1_12: LCD1.12 micro.6 programmer.6 | length 1941.3
  Top Layer w35.43: v1(2297,3735.57) 2393.43,3832 LCD1.12
  Bottom Layer w35.43: programmer.6 1287,3067 1728,3067 micro.6 2222.39,3297.39 2222.39,3660.95 v1(2297,3735.57)
NetLCD1_13: LCD1.13 micro.7 programmer.5 | length 4166.7
  Top Layer w35.43: programmer.5 1171,3051 1171,2613 1326,2458 1326,1850 1392,1784 1460,1784 1545,1869 1545,2167 1687,2309 1687,2662 micro.7 ; v1(1940.41,3531) 2293.43,3884.03 LCD1.13
  Bottom Layer w35.43: programmer.5 1651,3531 v1(1940.41,3531)
NetLCD1_14: LCD1.14 micro.8 programmer.4 | length 2603.8
  Top Layer w35.43: v1(2103,3785) 2193.43,3875.43 LCD1.14
  Bottom Layer w35.43: micro.8 1769,2644 1200,2644 1171,2673 1171,3151 programmer.4 1805,3785 v1(2103,3785)
NetLCD1_15: LCD1.15 R2.2 | length 605.2
  Top Layer w35.43: R2.2 1755,3522.14 2093.43,3860.57 LCD1.15
"Netled green_1": "led green.1" "led red.1" | length 285.6
  Top Layer w35.43: 2690,1350 2690,1220 2800,1110
"Netled green_2": "led green.2" Rtesterg.2 | length 281.4
  Top Layer w35.43: 2790,1350 2790,1210 Rtesterg.2
"Netled red_2": "led red.2" Rtester2.2 | length 135
  Bottom Layer w35.43: Rtester2.2 2700,1110
Netmicro_33: micro.33 R12.1 | length 1666.4
  Bottom Layer w35.43: micro.33 2402,2793 2402,3500 2438,3536 2600,3536 2661,3475 2661,2976 R12.1
Netmicro_34: micro.34 R11.1 | length 200.9
  Bottom Layer w35.43: micro.34 2555,2740 2565,2740 R11.1
Netmicro_35: micro.35 R10.1 | length 1963.7
  Top Layer w35.43: micro.35 2345,3050 2345,3490.53 2415.26,3560.79 2600.21,3560.79 2661,3500 2661,2596 R10.1
Netmicro_36: micro.36 R9.1 | length 828.5
  Bottom Layer w35.43: micro.36 2545,2950 2545,2869 2661,2753 2661,2455 2600,2394 R9.1
Netmicro_37: micro.37 R8.1 | length 1048
  Top Layer w35.43: micro.37 2531,3064 2531,2292.02 2600,2223.02 R8.1
Netmicro_38: micro.38 R7.1 | length 508.1
  Top Layer w35.43: micro.38 2402,3293 2402,3475 2436.6,3509.6 2540.4,3509.6 R7.1
Netmicro_39: micro.39 R6.1 | length 169.9
  Bottom Layer w35.43: micro.39 2520,3275 R6.1
Netmicro_40: micro.40 R5.1 | length 390.1
  Top Layer w35.43: micro.40 2533,3362 2533,3177 R5.1
pads on no net: "keypad res.1" LCD1.7 LCD1.8 LCD1.9 LCD1.10 LCD1.MH micro.4 programmer.7 programmer.8 programmer.9 usb.2 usb.3 usb.5 usb.6

## Keep-outs
Keep-Out Layer:
  lines w11.81: 1050,1020 5185,1020 5185,4140 1050,4140 1050,1035 1050,1025

## Other copper
Bottom Layer:
  text "Sajad Goudarzi" at 3355,3575 h60